# EAGLE board DA14580_QFN40_0v5_P (EAGLE 7.5.0)
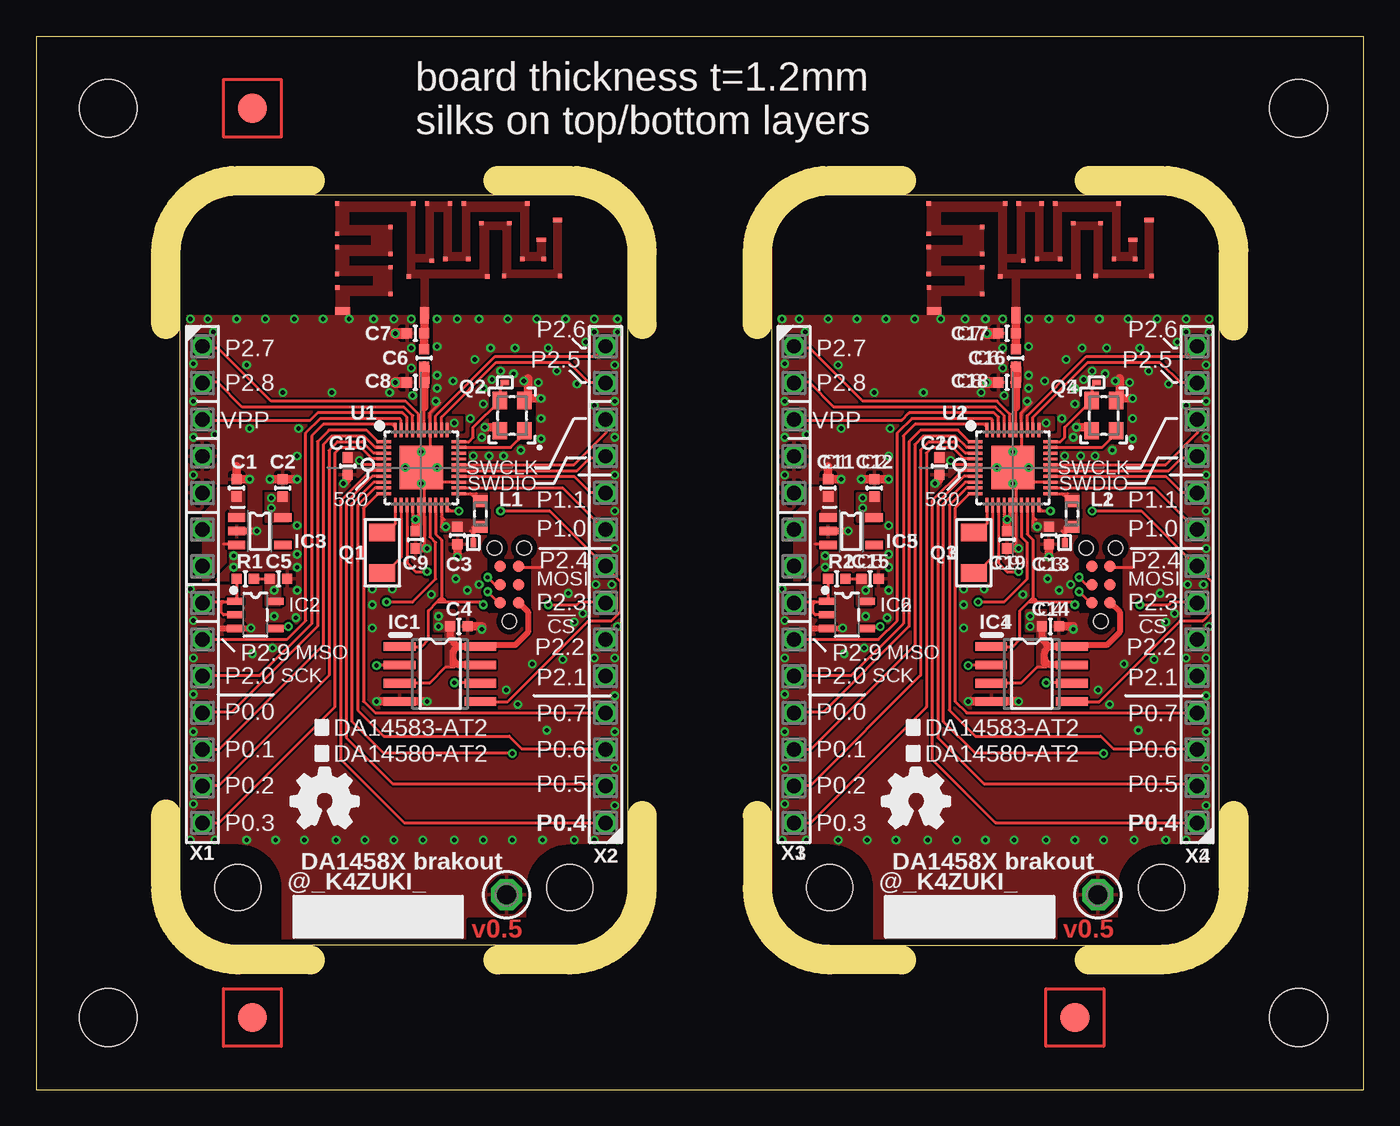
[diagram p0: board, top side]
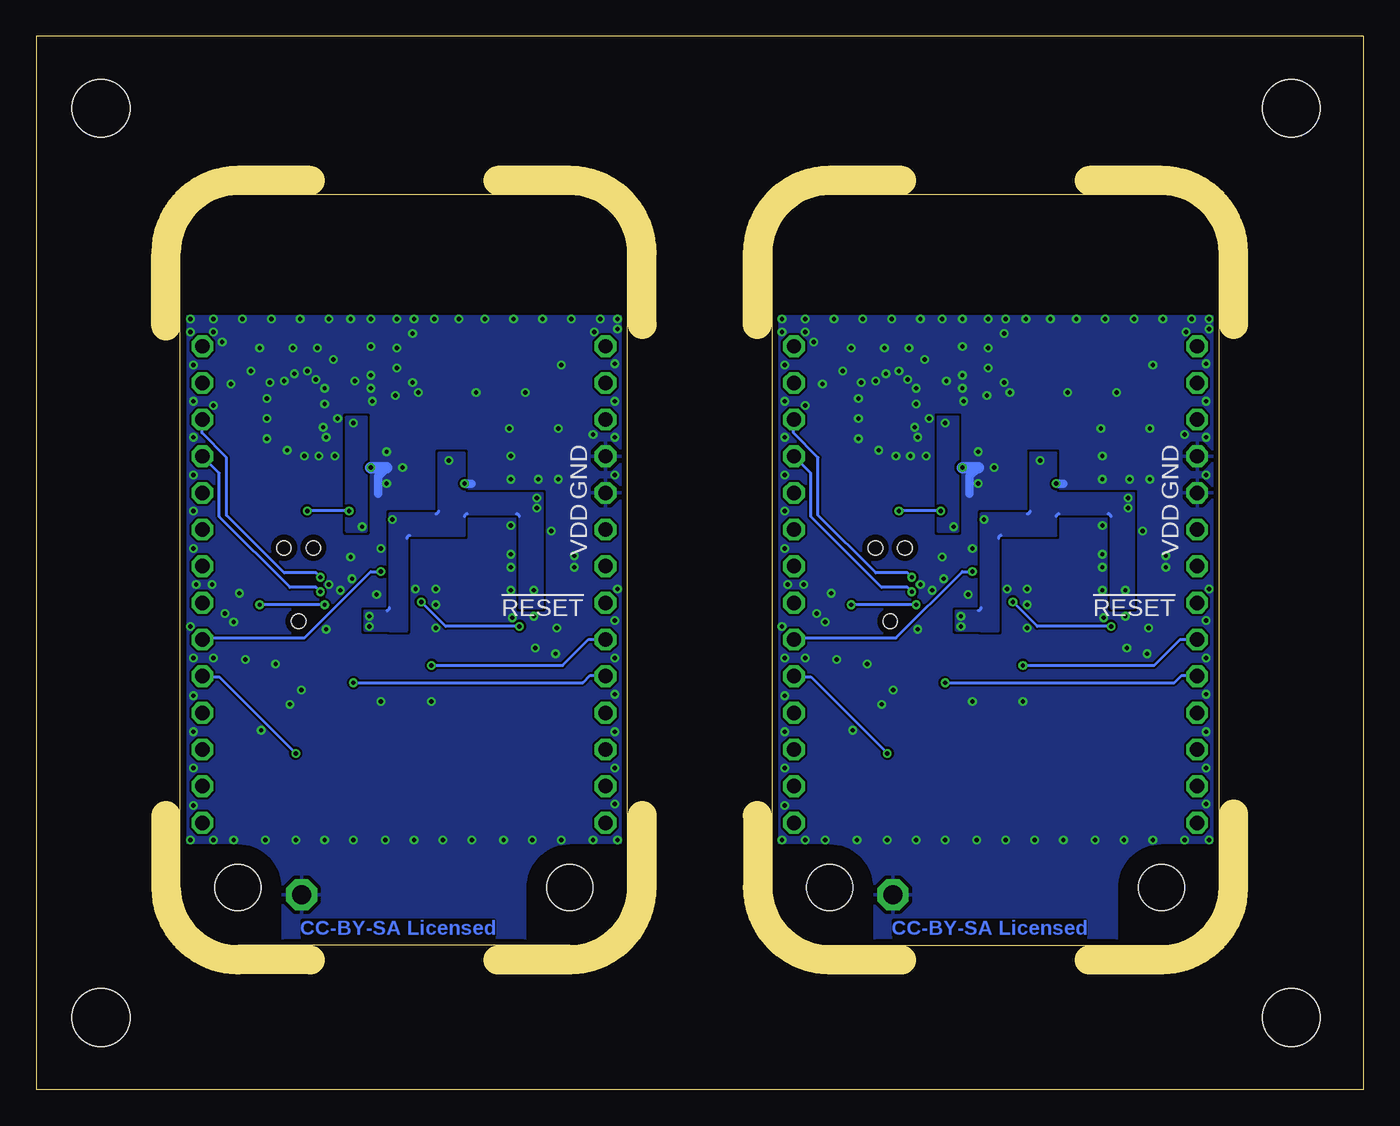
[diagram p1: board, bottom side, seen from below]

Size 92 x 73 mm. Coordinates in mm from the lower left corner, seen from the top.
Outline: 14,10 arc-90 10,14 10,58 arc-90 14,62 37,62 arc-90 41,58 41,14 arc-90 37,10 14,10
Outline: 0,73 92,73 92,0 0,0 0,73
Outline: 51,14 51,58 arc-90 55,62 78,62 arc-90 82,58 82,14 arc-90 78,10 55,10 arc-90 51,14
Copper layers (1*16): Top 0.0356mm / dielectric 1.5011mm / Bottom 0.0356mm
Design rules "SilverCircuits.2 *": minimum track width 0.15mm, minimum drill 0.3mm, track to track 0.15mm, track to pad 0.15mm, pad to pad 0.15mm, via to via 0.15mm, smd to smd 0mil, copper to edge 0.4mm, drill to drill 0.15mm, minimum pad ring 10mil, minimum via ring 0.15mm, stop-mask expansion 0.05mm, vias tented up to drill 100mil, thermal gap 10mil
Net classes: 0 signal: width 0.15 mm, drill 0.3 mm, clearance 0.15 mm; 1 power: width 0.15 mm, drill 0.3 mm, clearance 0.15 mm
Holes 3.2 mm at 14,14 37,14 55,14 78,14
Holes 4 mm at 5,5 5,68 87.5,68 87.5,5
tRestrict: area 23,36.8 to 24.8,37.6; area 30.2,39.6 to 31.4,40.2; area 31.5,44.8 to 34.5,48.6; area 10,10 to 17,17; area 34,10 to 41,17; area 10,53.7 to 20.2,62; area 37.2,53.7 to 41,62; area 26.3,50.5 to 27.5,53.8; area 31.4,33.1 to 34.2,36.7; area 64,36.8 to 65.8,37.6; area 71.2,39.6 to 72.4,40.2; area 72.5,44.8 to 75.5,48.6; 6 more areas; 34 lines
bRestrict: area 34,10 to 41,17; area 10,10 to 17,17; area 10,53.7 to 20.2,62; area 37.2,53.7 to 41,62; area 75,10 to 82,17; area 51,10 to 58,17; area 51,53.7 to 61.2,62; area 78.2,53.7 to 82,62; 12 lines
Milling: 24 lines

## Footprints (pad centres in the part's own frame; a part is rotated, then mirrored left to right if it is on the bottom)
C0402 = smd 0.7 x 0.7: 1 -0.6,0; 2 0.6,0
CON_TC2030-IDC-NL = smd 0.787 x 0.787: 1 -1.27,-0.635; 2 -1.27,0.635; 3 0,-0.635; 4 0,0.635; 5 1.27,-0.635; 6 1.27,0.635 | hole 0.991: -2.54,0; 2.54,1.016; 2.54,-1.016
IC_08_1.27_150MIL = smd 0.6 x 2.2: 1 -1.905,-2.8; 2 -0.635,-2.8; 3 0.635,-2.8; 4 1.905,-2.8; 5 1.905,2.8; 6 0.635,2.8; 7 -0.635,2.8 | smd 0.603 x 2.2: 8 -1.905,2.8
SOT23-5 = smd 0.5 x 1.1: 1 -0.95,-1.4; 2 0,-1.4; 3 0.95,-1.4; 4 0.95,1.4; 5 -0.95,1.4
IC_05_0.95_50MIL = smd 0.6 x 1.2: 1 -0.95,-1.6; 2 0,-1.6; 3 0.95,-1.6; 4 0.95,1.6; 5 -0.95,1.6
L_1608 = smd 0.8 x 1: 1 -0.9,0; 2 0.9,0
CRYSTAL_FC-135 = smd 1.2 x 1.8: 1 -1.4,0; 2 1.4,0
CLOCK_2520 = smd 1.2 x 1: 1 -1.05,-0.85; 2 1.05,-0.85; 3 1.05,0.85; 4 -1.05,0.85
TP06RECT = smd 0.4 x 0.6: TP 0,0
P1-13 = drill 1.321 pad 2.159 octagon: TP 0,0
FIDUCIAL = smd 2 x 2: TP 0,0
QFN40_0.4P5.0X5.0 = smd 1 x 0.2: 1 -2.6,1.8; 2 -2.6,1.4; 3 -2.6,1; 4 -2.6,0.6; 5 -2.6,0.2; 6 -2.6,-0.2; 7 -2.6,-0.6; 8 -2.6,-1; 9 -2.6,-1.4; 10 -2.6,-1.8; 21 2.6,-1.8; 22 2.6,-1.4; 23 2.6,-1; 24 2.6,-0.6; 25 2.6,-0.2; 26 2.6,0.2; 27 2.6,0.6; 28 2.6,1; 29 2.6,1.4; 30 2.6,1.8 | smd 0.2 x 1: 11 -1.8,-2.6; 12 -1.4,-2.6; 13 -1,-2.6; 14 -0.6,-2.6; 15 -0.2,-2.6; 16 0.2,-2.6; 17 0.6,-2.6; 18 1,-2.6; 19 1.4,-2.6; 20 1.8,-2.6; 31 1.8,2.6; 32 1.4,2.6; 33 1,2.6; 34 0.6,2.6; 35 0.2,2.6; 36 -0.2,2.6; 37 -0.6,2.6; 38 -1,2.6; 39 -1.4,2.6; 40 -1.8,2.6 | smd 3 x 3: BP 0,0
ANT_IFA_V2 = smd 0.6 x 0.6: ANT 0.015,-0.3 | smd 1.02 x 0.5: GND -5.66,0.25 | smd 0.3 x 0.3: GND@1 -2.33,1.42; GND@3 -6.02,1.88; GND@4 -2.33,3.28; GND@5 -6.03,2.81; GND@6 -6.03,4.68; GND@7 -2.33,4.21; GND@8 -2.33,6.07; GND@9 -6.03,5.61; GND@10 -6.03,7.69; GND@11 -0.74,7.69; GND@12 -1.07,2.65; GND@13 4.37,2.65; GND@14 0.53,3.73; GND@15 0.2,7.69; GND@16 1.8,7.69; GND@17 1.47,3.86; GND@18 3.07,3.86; GND@19 2.74,7.69; GND@20 7.14,7.69; GND@21 3.97,6.33; GND@22 5.89,6.33; GND@23 5.54,2.67; GND@24 6.8,3.86; GND@25 8.28,3.86; GND@26 7.94,5.19; GND@27 8.28,5.19; GND@28 9.42,2.67; GND@29 9.08,6.56; GND@30 9.42,6.56 | smd 0.63 x 0.5: GND@2 0.015,0.25
SSW-114-02-S-S = drill 1 pad 1.5 octagon: 1 -16.51,0; 2 -13.97,0; 3 -11.43,0; 4 -8.89,0; 5 -6.35,0; 6 -3.81,0; 7 -1.27,0; 8 1.27,0; 9 3.81,0; 10 6.35,0; 11 8.89,0; 12 11.43,0; 13 13.97,0; 14 16.51,0

## Placement (x,y rotation side)
C1  [C0402]  13.9,41.7 90 top
C2  [C0402]  17.1,41.7 90 top
C3  [C0402]  29.2,38.4 270 top
C4  [C0402]  29.3,32.1 0 top
C5  [C0402]  16.8,35.4 0 top
C6  NM  [C0402]  26.9,50.7 90 top
C7  NM  [C0402]  26.3,52.4 180 top
C8  NM  [C0402]  26.3,49 180 top
C9  [C0402]  26.3,38.1 270 top
C10  [C0402]  21.6,43.2 270 top
C11  [C0402]  54.9,41.7 90 top
C12  [C0402]  58.1,41.7 90 top
C13  [C0402]  70.2,38.4 270 top
C14  [C0402]  70.3,32.1 0 top
C15  [C0402]  57.8,35.4 0 top
C16  NM  [C0402]  67.9,50.7 90 top
C17  NM  [C0402]  67.3,52.4 180 top
C18  NM  [C0402]  67.3,49 180 top
C19  [C0402]  67.3,38.1 270 top
C20  [C0402]  62.6,43.2 270 top
CON1  CON_TC2030-CTL-NL  [CON_TC2030-IDC-NL]  32.8,35 90 top
CON2  CON_TC2030-CTL-NL  [CON_TC2030-IDC-NL]  73.8,35 90 top
IC1  IC_MEMORY_8P_AT25XE011_SOP  [IC_08_1.27_150MIL]  28,28.8 270 top
IC2  NC7SZ00M5XCT-ND  [SOT23-5]  15.2,32.9 270 top
IC3  LDO5_3.3_SOT23  [IC_05_0.95_50MIL]  15.5,38.7 270 top
IC4  IC_MEMORY_8P_AT25XE011_SOP  [IC_08_1.27_150MIL]  69,28.8 270 top
IC5  LDO5_3.3_SOT23  [IC_05_0.95_50MIL]  56.5,38.7 270 top
IC6  NC7SZ00M5XCT-ND  [SOT23-5]  56.2,32.9 270 top
L1  [L_1608]  30.8,39.9 90 top
L2  [L_1608]  71.8,39.9 90 top
Q1  32.768k  [CRYSTAL_FC-135]  24,37.2 90 top
Q2  16M/2520  [CLOCK_2520]  33,46.7 90 top
Q3  32.768k  [CRYSTAL_FC-135]  65,37.2 90 top
Q4  16M/2520  [CLOCK_2520]  74,46.7 90 top
R1  [C0402]  14.5,35.4 0 top
R2  [C0402]  55.5,35.4 0 top
TP1  TESTPAD  [TP06RECT]  30.3,37.9 0 top
TP2  TESTPAD  [TP06RECT]  32.5,49 90 top
TP3  TPPAD1-13  [P1-13]  32.6,13.5 0 top
TP4  TPPAD1-13  [P1-13]  73.6,13.5 0 top
TP5  TESTPAD  [TP06RECT]  71.3,37.9 0 top
TP6  TESTPAD  [TP06RECT]  73.5,49 90 top
TP91  TESTPAD_F  [FIDUCIAL]  15,68 0 top
TP92  TESTPAD_F  [FIDUCIAL]  15,5 0 top
TP93  TESTPAD_F  [FIDUCIAL]  72,5 0 top
U1  DA14583AT2  [QFN40_0.4P5.0X5.0]  26.7,43.1 0 top
U2  DA14583AT2  [QFN40_0.4P5.0X5.0]  67.7,43.1 0 top
U$1  ANT_IFA  [ANT_IFA_V2]  26.9,53.7 0 top
U$2  ICON_OSHW  [ICON_OSHW]  20,20 0 top
U$3  ANT_IFA  [ANT_IFA_V2]  67.9,53.7 0 top
U$4  ICON_OSHW  [ICON_OSHW]  61,20 0 top
X1  SSW-114-02-S-S  [SSW-114-02-S-S]  11.53,35 270 top
X2  SSW-114-02-S-S  [SSW-114-02-S-S]  39.47,35 90 top
X3  SSW-114-02-S-S  [SSW-114-02-S-S]  52.53,35 270 top
X4  SSW-114-02-S-S  [SSW-114-02-S-S]  80.47,35 90 top

## Library data of the parts
C1-C3 C9 C11-C13 C19 = mylib; DIGIKEY: 490-3890-1-ND
C4 C5 C10 C14 C15 C20 = mylib; DIGIKEY: 490-3261-1-ND
C6 C16 = mylib; DIGIKEY: 490-5921-1-ND
C7 C8 C17 C18 CON1 CON2 TP1 TP2 TP5 TP6 TP91-TP93 U$1-U$4 = mylib
IC1 IC4 = mylib; DIGIKEY: 1265-1137-1-ND
IC2 IC6 = 74xx-little-us_local
IC3 IC5 = mylib; AKIZUKI: I-05448
L1 L2 = mylib; DIGIKEY: 445-6385-1-ND
Q1 Q3 = mylib; DIGIKEY: 728-1076-1-ND
Q2 Q4 = mylib; DIGIKEY: 887-1833-1-ND
R1 R2 = mylib; DIGIKEY: P10.0KLCT-ND
TP3 TP4 = testpad_local
U1 U2 = mylib; MOUSER: 724-DA14583-01AT2
X1-X4 = con-samtec.local

## Nets
!RESET!: IC2.1 IC2.2 R1.1 X1.8
!RESET!1: IC6.1 IC6.2 R2.1 X3.8
GND: C1.2 C2.2 C3.2 C4.2 C5.2 C6.2 C7.1 C7.2 C8.2 C9.2 C10.2 CON1.5 IC1.4 IC2.3 IC3.2 Q2.2 Q2.4 TP3.TP U1.16 U1.23 U1.34 U1.BP U$1.ANT U$1.GND U$1.GND@1 U$1.GND@2 U$1.GND@3 U$1.GND@4 U$1.GND@5 U$1.GND@6 U$1.GND@7 U$1.GND@8 U$1.GND@9 U$1.GND@10 U$1.GND@11 U$1.GND@12 U$1.GND@13 U$1.GND@14 U$1.GND@15 U$1.GND@16 U$1.GND@17 U$1.GND@18 U$1.GND@19 U$1.GND@20 U$1.GND@21 U$1.GND@22 U$1.GND@23 U$1.GND@24 U$1.GND@25 U$1.GND@26 U$1.GND@27 U$1.GND@28 U$1.GND@29 U$1.GND@30 X1.4 X1.5
GND1: C11.2 C12.2 C13.2 C14.2 C15.2 C16.2 C17.1 C17.2 C18.2 C19.2 C20.2 CON2.5 IC4.4 IC5.2 IC6.3 Q4.2 Q4.4 TP4.TP U2.16 U2.23 U2.34 U2.BP U$3.ANT U$3.GND U$3.GND@1 U$3.GND@2 U$3.GND@3 U$3.GND@4 U$3.GND@5 U$3.GND@6 U$3.GND@7 U$3.GND@8 U$3.GND@9 U$3.GND@10 U$3.GND@11 U$3.GND@12 U$3.GND@13 U$3.GND@14 U$3.GND@15 U$3.GND@16 U$3.GND@17 U$3.GND@18 U$3.GND@19 U$3.GND@20 U$3.GND@21 U$3.GND@22 U$3.GND@23 U$3.GND@24 U$3.GND@25 U$3.GND@26 U$3.GND@27 U$3.GND@28 U$3.GND@29 U$3.GND@30 X3.4 X3.5
N$1: C6.1 C8.1 U1.35
N$2: Q3.1 U2.12
N$3: Q3.2 U2.11
N$4: Q4.1 U2.29
N$5: Q4.3 TP6.TP U2.30
N$6: L1.2 U1.21
N$7: L2.2 U2.21
N$8: C13.1 L2.1 TP5.TP U2.19 U2.31
N$9: C3.1 L1.1 TP1.TP U1.19 U1.31
N$10: C16.1 C18.1 U2.35
N$18: Q1.1 U1.12
N$19: Q1.2 U1.11
N$20: Q2.1 U1.29
N$21: Q2.3 TP2.TP U1.30
P0_0: U1.1 X1.11
P0_1: U1.2 X1.12
P0_2: U1.3 X1.13
P0_3: U1.4 X1.14
P0_4: U1.6 X2.1
P0_5: U1.7 X2.2
P0_6: U1.9 X2.3
P0_7: U1.10 X2.4
P0_8: U2.1 X3.11
P0_9: U2.2 X3.12
P0_10: U2.3 X3.13
P0_11: U2.4 X3.14
P0_12: U2.7 X4.2
P0_13: U2.6 X4.1
P0_14: U2.10 X4.4
P0_15: U2.9 X4.3
P1_0: U1.22 X2.9
P1_1: U1.24 X2.10
P1_2: U1.27
P1_3: U1.28
P1_4: U2.22 X4.9
P1_5: U2.24 X4.10
P1_6: U2.27
P1_7: U2.28
P2_0: IC1.6 U1.40 X1.10
P2_1: U1.8 X2.5
P2_2: U1.13 X2.6
P2_3: IC1.1 U1.18 X2.7
P2_4: IC1.5 U1.20 X2.8
P2_5: U1.32 X2.13
P2_6: U1.33 X2.14
P2_7: U1.36 X1.1
P2_8: U1.37 X1.2
P2_9: IC1.2 U1.39 X1.9
P2_10: IC4.1 U2.18 X4.7
P2_11: U2.13 X4.6
P2_12: IC4.6 U2.40 X3.10
P2_13: U2.8 X4.5
P2_14: U2.32 X4.13
P2_15: U2.33 X4.14
P2_16: IC4.2 U2.39 X3.9
P2_17: IC4.5 U2.20 X4.8
P2_18: U2.36 X3.1
P2_19: U2.37 X3.2
RESET: IC2.4 U1.17
RESET1: IC6.4 U2.17
SWCLK: CON1.4 U1.26 X2.12
SWCLK1: CON2.4 U2.26 X4.12
SWDIO: CON1.2 U1.25 X2.11
SWDIO1: CON2.2 U2.25 X4.11
VCC: C2.1 C4.1 C5.1 C9.1 C10.1 CON1.1 IC1.3 IC1.7 IC1.8 IC2.5 IC3.5 R1.2 U1.5 U1.14 U1.15
VCC1: C12.1 C14.1 C15.1 C19.1 C20.1 CON2.1 IC4.3 IC4.7 IC4.8 IC5.5 IC6.5 R2.2 U2.5 U2.14 U2.15
VDD: C1.1 IC3.1 IC3.3 X1.6 X1.7
VDD1: C11.1 IC5.1 IC5.3 X3.6 X3.7
VPP [power]: U1.38 X1.3
VPP1 [power]: U2.38 X3.3

## Tracks (layer width: path | path; a pad name or v marks a point on that pad's centre or on a via)
!RESET!
  Top 0.2: 12.8,33.8 12.8,33.6 | 12.8,33.6 12.8,33.1 13,32.9 IC2.2 | X1.8 11.6,33.8 12.6,33.8 | 12.6,33.8 12.8,33.8 | 12.6,33.8 12.8,33.6 | 12.8,33.6 13,33.8 | 13,33.8 12.8,33.8 | 13,33.8 13.75,33.8 IC2.1 13.9,33.95 R1.1
!RESET!1
  Top 0.2: 53.8,33.8 53.8,33.6 | 53.8,33.6 53.8,33.1 54,32.9 IC6.2 | X3.8 52.6,33.8 53.6,33.8 | 53.6,33.8 53.8,33.8 | 53.6,33.8 53.8,33.6 | 53.8,33.6 54,33.8 | 54,33.8 53.8,33.8 | 54,33.8 54.75,33.8 IC6.1 54.9,33.95 R2.1
GND  (via drill 0.3)
  Top 0.2: U1.23 27.7,42.1 | 26.9,37.5 U1.16 26.9,41.8 v26.7,42 U1.BP 27.3,43.7 U1.34 27.3,46.9 28,47.6 | CON1.5 33.5,36.2 35,36.2
  Top 0.3: v14.9,32 12.8,32 12.8,31.9 14.9,31.9
  Top 0.5: v15.3,38.7 IC3.2
  Top 0.6: v35,47.9 34,47.9 Q2.2 | 34.1,49.3 34.1,48.3 | v31.1,45.9 31.9,45.9 Q2.4 | v21.3,42 21.6,42.3 C10.2 | U$1.ANT 26.91,52.41 C7.1 C6.2 | v27.1,37.5 C9.2 | v29.2,36.9 C3.2 | C4.2 30.9,32.1 v30.9,31.9 | v23.6,26.9 v27.1,26.9 | v14.8,42.3 C1.2 13.9,43.2 | v16.2,42.3 C2.2 v18.1,42.3
  Top 0.63: U$1.GND@2 U$1.ANT
  Top 0.75: v24.9,49 C8.2 | v24.9,52.4 C7.2
  Bottom 0.6: 27.3,41.3 27.3,42.5 U1.BP | v21.3,42 20.8,42
  Bottom 0.8: v27.8,43.1 U1.BP
  other vias: 33.8,49.1 30.3,43.9 31.4,43.9 32.4,43.9 33.6,44.3 30.9,45.2 30.1,46.5 31,47.5 31,48.6 33.1,49.6 34.8,49 35,46.5 35,45.1 18.1,34.6 31.6,49.2 19.9,53.4 21.7,53.4 17.9,53.4 13.9,53.4 15.9,53.4 23.4,53.4 10.7,53.4 11.9,53.4 26,53.4 29.2,53.4 30.7,53.4 10.9,50.3 10.9,47.7 10.9,45.2 10.9,42.6 10.9,32.5 10.9,29.9 10.9,27.4 40.1,50.2 40.1,47.7 40.1,45.2 40.1,42.6 40.1,40.1 40.1,37.5 39.9,35 40.3,32.1 40.1,29.9 10.7,52.7 40.3,52.5 27.8,53.4 27.8,49.5 27.8,51.5 32.7,53.4 34.7,53.4 36.7,53.4 38.7,53.4 40.3,53.4 26,51.4 26,50 27.7,47.7 10.9,24.8 10.9,22.3 10.9,19.8 10.7,17.3 12.4,17.3 26.1,48.1 18.6,17.3 14.6,17.3 16.6,17.3 26.8,17.3 24.8,17.3 20.8,17.3 22.8,17.3 33,17.3 29,17.3 31,17.3 38.7,17.3 40.3,17.3 35.1,17.3 37.3,17.3 40.1,27.3 40.1,24.8 40.1,22.3 40.1,19.7 24.8,53.4 27.8,48.6 12.3,52.5 14.6,50.2 17.1,48.3 20.5,48.3 24.5,48.3 28.9,49.1 30.4,50.6 31.5,51.4 33.2,51.4 35.5,51.4 38.1,51.8 38.7,52.5 38.7,47.4 37.5,48.9 36.1,49.8 12.4,45.4 18.2,45.8 14.8,45.8 18.1,43.9 18.1,39.1 18.1,37.1 18.1,36.2 18,32.7 16.5,32.8 16.4,30.6 15,30.2 29.1,35.4 29.9,34.6 30.7,35 36.9,34.4 38.8,35 23.3,32 23.3,34.7 23.3,33.6 24.7,34.7 27.4,34.3 37.9,33 37.3,32.4 10.7,34.7 32.6,27.7 34.4,29.5 33.4,26.7 36.5,29.8 38.7,29.9 35.4,24.9 13.7,37 13.7,36.2 26.7,44.2 25.6,43.1 32.2,49.8
  pour Top (rank 2): 10,62 41,62 41,10 10,10
  pour Bottom (rank 2): 10,62 41,62 41,10 10,10
  pour Top (no thermals): 30.1,44.8 35.2,44.8 35.2,49.2 30.1,49.2
  pour Bottom (no thermals): 24.7,42.7 26.7,42.7 26.7,43.5 24.7,43.5
  pour Bottom (no thermals): 27.1,43.1 27.1,45.1 26.3,45.1 26.3,43.1
  pour Bottom (no thermals): 27.1,41.1 27.1,43.1 26.3,43.1 26.3,41.1
GND1  (via drill 0.3)
  Top 0.2: U2.23 68.7,42.1 | 67.9,37.5 U2.16 67.9,41.8 v67.7,42 U2.BP 68.3,43.7 U2.34 68.3,46.9 69,47.6 | CON2.5 74.5,36.2 76,36.2
  Top 0.3: v55.9,32 53.8,32 53.8,31.9 55.9,31.9
  Top 0.5: v56.3,38.7 IC5.2
  Top 0.6: v76,47.9 75,47.9 Q4.2 | 75.1,49.3 75.1,48.3 | v72.1,45.9 72.9,45.9 Q4.4 | v62.3,42 62.6,42.3 C20.2 | U$3.ANT 67.92,52.41 C17.1 C16.2 | v68.1,37.5 C19.2 | v70.2,36.9 C13.2 | C14.2 71.9,32.1 v71.9,31.9 | v64.6,26.9 v68.1,26.9 | v55.8,42.3 C11.2 54.9,43.2 | v57.2,42.3 C12.2 v59.1,42.3
  Top 0.63: U$3.GND@2 U$3.ANT
  Top 0.75: v65.9,49 C18.2 | v65.9,52.4 C17.2
  Bottom 0.6: 68.3,41.3 68.3,42.5 U2.BP | v62.3,42 61.8,42
  Bottom 0.8: v68.8,43.1 U2.BP
  other vias: 74.8,49.1 71.3,43.9 72.4,43.9 73.4,43.9 74.6,44.3 71.9,45.2 71.1,46.5 72,47.5 72,48.6 74.1,49.6 75.8,49 76,46.5 76,45.1 59.1,34.6 72.6,49.2 60.9,53.4 62.7,53.4 58.9,53.4 54.9,53.4 56.9,53.4 64.4,53.4 51.7,53.4 52.9,53.4 67,53.4 70.2,53.4 71.7,53.4 51.9,50.3 51.9,47.7 51.9,45.2 51.9,42.6 51.9,32.5 51.9,29.9 51.9,27.4 81.1,50.2 81.1,47.7 81.1,45.2 81.1,42.6 81.1,40.1 81.1,37.5 80.9,35 81.3,32.1 81.1,29.9 51.7,52.7 81.3,52.5 68.8,53.4 68.8,49.5 68.8,51.5 73.7,53.4 75.7,53.4 77.7,53.4 79.7,53.4 81.3,53.4 67,51.4 67,50 68.7,47.7 51.9,24.8 51.9,22.3 51.9,19.8 51.7,17.3 53.4,17.3 67.1,48.1 59.6,17.3 55.6,17.3 57.6,17.3 67.8,17.3 65.8,17.3 61.8,17.3 63.8,17.3 74,17.3 70,17.3 72,17.3 79.7,17.3 81.3,17.3 76.1,17.3 78.3,17.3 81.1,27.3 81.1,24.8 81.1,22.3 81.1,19.7 65.8,53.4 68.8,48.6 53.3,52.5 55.6,50.2 58.1,48.3 61.5,48.3 65.5,48.3 69.9,49.1 71.4,50.6 72.5,51.4 74.2,51.4 76.5,51.4 79.1,51.8 79.7,52.5 79.7,47.4 78.5,48.9 77.1,49.8 53.4,45.4 59.2,45.8 55.8,45.8 59.1,43.9 59.1,39.1 59.1,37.1 59.1,36.2 59,32.7 57.5,32.8 57.4,30.6 56,30.2 70.1,35.4 70.9,34.6 71.7,35 77.9,34.4 79.8,35 64.3,32 64.3,34.7 64.3,33.6 65.7,34.7 68.4,34.3 78.9,33 78.3,32.4 51.7,34.7 73.6,27.7 75.4,29.5 74.4,26.7 77.5,29.8 79.7,29.9 76.4,24.9 54.7,37 54.7,36.2 67.7,44.2 66.6,43.1 73.2,49.8
  pour Top (rank 2): 51,62 82,62 82,10 51,10
  pour Bottom (rank 2): 51,62 82,62 82,10 51,10
  pour Top (no thermals): 71.1,44.8 76.2,44.8 76.2,49.2 71.1,49.2
  pour Bottom (no thermals): 65.7,42.7 67.7,42.7 67.7,43.5 65.7,43.5
  pour Bottom (no thermals): 68.1,43.1 68.1,45.1 67.3,45.1 67.3,43.1
  pour Bottom (no thermals): 68.1,41.1 68.1,43.1 67.3,43.1 67.3,41.1
N$1
  Top 0.2: U1.35 26.9,47.3
  Top 0.6: 26.9,47.3 C8.1
  Top 0.75: C6.1 C8.1
N$2
  Top 0.2: U2.12 66.3,36.9 65.3,35.9 Q3.1
N$3
  Top 0.2: U2.11 65.9,39.2 65.2,38.5 Q3.2
N$4
  Top 0.2: U2.29 73.9,44.5 74.85,45.45 Q4.1
N$5
  Top 0.2: U2.30 71,44.9 71.3,45.2 71.3,45.9 Q4.3 73.2,47.8 73.2,48.7 TP6.TP
N$6
  Top 0.2: U1.21 30.1,41.3 | 30.1,41.3 30.5,41.3 | 30.1,41.3 30.4,41
  pour Top (no thermals): 30.4,41.3 31.2,41.3 31.2,40.4 30.4,40.4
N$7
  Top 0.2: U2.21 71.1,41.3 | 71.1,41.3 71.5,41.3 | 71.1,41.3 71.4,41
  pour Top (no thermals): 71.4,41.3 72.2,41.3 72.2,40.4 71.4,40.4
N$8  (via drill 0.3)
  Top 0.2: U2.19 69.1,39.7 | 69.1,39.7 69.1,39 | 71.3,38.5 71.3,39 L2.1 | 69.1,39.7 69.3,39.5 | 71.3,38.5 71.1,38.7 | 71.3,38.5 71.5,38.7 | 71.3,38.5 TP5.TP
  other vias: 69.4,39 70,46.2
  pour Top (no thermals): 69.1,39.5 72.2,39.5 72.2,38.7 69.1,38.7
  pour Top (no thermals): 69.5,46.6 70.5,46.6 70.5,45.7 69.5,45.7
  pour Bottom (no thermals): 69.1,46.6 70.5,46.6 70.5,38.7 69.1,38.7
N$9  (via drill 0.3)
  Top 0.2: U1.19 28.1,39.7 | 28.1,39.7 28.1,39 | 30.3,38.5 30.3,39 L1.1 | 28.1,39.7 28.3,39.5 | 30.3,38.5 30.1,38.7 | 30.3,38.5 30.5,38.7 | 30.3,38.5 TP1.TP
  other vias: 28.4,39 29,46.2
  pour Top (no thermals): 28.1,39.5 31.2,39.5 31.2,38.7 28.1,38.7
  pour Top (no thermals): 28.5,46.6 29.5,46.6 29.5,45.7 28.5,45.7
  pour Bottom (no thermals): 28.1,46.6 29.5,46.6 29.5,38.7 28.1,38.7
N$10
  Top 0.2: U2.35 67.9,47.3
  Top 0.6: 67.9,47.3 C18.1
  Top 0.75: C16.1 C18.1
N$18
  Top 0.2: U1.12 25.3,36.9 24.3,35.9 Q1.1
N$19
  Top 0.2: U1.11 24.9,39.2 24.2,38.5 Q1.2
N$20
  Top 0.2: U1.29 32.9,44.5 33.85,45.45 Q2.1
N$21
  Top 0.2: U1.30 30,44.9 30.3,45.2 30.3,45.9 Q2.3 32.2,47.8 32.2,48.7 TP2.TP
P0_0
  Top 0.2: X1.11 11.53,26.13 11.6,26.2 13.6,26.2 19.5,32.1 19.5,44.9 20.3,45.7 22.9,45.7 23.7,44.9 U1.1
P0_1
  Top 0.2: U1.2 23.5,44.5 22.7,45.3 20.5,45.3 19.9,44.7 19.9,30.8 12.7,23.6 11.6,23.6 11.57,23.57 X1.12
P0_2
  Top 0.2: U1.3 23.4,44.1 22.6,44.9 20.9,44.9 20.3,44.3 20.3,28.7 12.7,21.1 11.7,21.1 11.63,21.03 X1.13
P0_3
  Top 0.2: U1.4 23.3,43.7 22.5,44.5 21.1,44.5 20.7,44.1 20.7,26.5 12.7,18.5 11.6,18.5 11.59,18.49 X1.14
P0_4
  Top 0.2: U1.6 23.2,42.9 21.1,40.8 21.1,22.9 25.5,18.5 X2.1
P0_5
  Top 0.2: U1.7 23.3,42.5 21.5,40.7 21.5,24.4 24.7,21.2 39.3,21.2 X2.2
P0_6
  Top 0.2: U1.9 23.5,41.7 22.3,40.5 22.3,26.3 24.1,24.5 32.8,24.5 33.7,23.6 39.4,23.6 39.43,23.57 X2.3
P0_7
  Top 0.2: X2.4 23.5,26.1 22.7,26.9 22.7,40.3 23.7,41.3 U1.10
P0_8
  Top 0.2: X3.11 52.53,26.13 52.6,26.2 54.6,26.2 60.5,32.1 60.5,44.9 61.3,45.7 63.9,45.7 64.7,44.9 U2.1
P0_9
  Top 0.2: U2.2 64.5,44.5 63.7,45.3 61.5,45.3 60.9,44.7 60.9,30.8 53.7,23.6 52.6,23.6 52.57,23.57 X3.12
P0_10
  Top 0.2: U2.3 64.4,44.1 63.6,44.9 61.9,44.9 61.3,44.3 61.3,28.7 53.7,21.1 52.7,21.1 52.63,21.03 X3.13
P0_11
  Top 0.2: U2.4 64.3,43.7 63.5,44.5 62.1,44.5 61.7,44.1 61.7,26.5 53.7,18.5 52.6,18.5 52.59,18.49 X3.14
P0_12
  Top 0.2: U2.7 64.3,42.5 62.5,40.7 62.5,24.4 65.7,21.2 80.3,21.2 X4.2
P0_13
  Top 0.2: U2.6 64.2,42.9 62.1,40.8 62.1,22.9 66.5,18.5 X4.1
P0_14
  Top 0.2: X4.4 64.5,26.1 63.7,26.9 63.7,40.3 64.7,41.3 U2.10
P0_15
  Top 0.2: U2.9 64.5,41.7 63.3,40.5 63.3,26.3 65.1,24.5 73.8,24.5 74.7,23.6 80.4,23.6 80.43,23.57 X4.3
P1_0
  Top 0.2: X2.9 39.38,38.9 39.3,38.9 36.5,41.7 U1.22
P1_1
  Top 0.2: U1.24 37.3,42.5 38.4,41.4 39.42,41.4 X2.10
P1_4
  Top 0.2: X4.9 80.38,38.9 80.3,38.9 77.5,41.7 U2.22
P1_5
  Top 0.2: U2.24 78.3,42.5 79.4,41.4 80.42,41.4 X4.10
P2_0  (via drill 0.3)
  Top 0.2: IC1.6 30.73,28.16 30.7,28.2 v29,28.2 | X1.10 11.55,28.65 11.6,28.7 15.5,28.7 19.1,32.3 19.1,45.3 19.9,46.1 24.7,46.1 | 24.7,46.1 24.9,46.1 24.9,45.9 | 24.9,45.9 U1.40 | 24.7,46.1 24.9,45.9
  Bottom 0.2: v29,28.2 13.1,28.2 12.6,28.7 11.58,28.7 X1.10
P2_1  (via drill 0.3)
  Top 0.2: v33,23.3 24.1,23.3 21.9,25.5 21.9,40.6 23.4,42.1 U1.8
  Bottom 0.2: X2.5 39.45,28.65 39.4,28.6 38.3,28.6 v33,23.3
P2_2  (via drill 0.3)
  Top 0.2: U1.13 25.7,36.5 26.3,35.9 v27.1,35.9
  Bottom 0.2: X2.6 39.41,31.19 39.3,31.3 32.4,31.3 27.8,35.9 v27.1,35.9
P2_3  (via drill 0.3)
  Top 0.2: IC1.1 26.7,30.7 27.2,31.2 27.2,33.2 27.8,33.8 | 27.8,33.8 27.9,33.9 | 27.9,33.9 28.1,34.1 | U1.18 27.7,38.5 28.1,38.1 28.1,34.1 | 27.8,33.8 28.4,33.8 | 28.4,33.8 30.8,33.8 v31,33.6 | v35.5,33.6 37.5,33.6 37.7,33.8 39.4,33.8 X2.7 | 28.1,34.1 28.3,33.9 | 28.3,33.9 28.4,33.8 | 27.9,33.9 28.3,33.9
  Bottom 0.2: v31,33.6 v35.5,33.6
P2_4  (via drill 0.3, 0.3 pad 0.6)
  Top 0.2: IC1.5 32.7,26.89 38.3,32.5 39.9,32.5 40.5,33.1 40.5,35.2 39.5,36.2 39.5,36.3 X2.8 39.44,36.3 39.4,36.3 35.6,40.1 v32.2,40.1 | U1.20 28.5,40.3 | 28.5,40.3 28.5,40.1 28.7,40.1 | 28.7,40.1 v29.3,40.1 | 28.5,40.3 28.7,40.1
  Bottom 0.2: v29.3,40.1 v32.2,40.1
P2_5
  Top 0.2: U1.32 28.1,46.6 31.9,50.4 36.9,50.4 38.3,49 39.44,49 X2.13
P2_6
  Top 0.2: U1.33 27.7,46.7 31.8,50.8 38.76,50.8 X2.14 39.4,51.51 | 39.4,51.51 39.4,51.6 | 39.4,51.51 39.4,51.4
P2_7
  Top 0.2: U1.36 26.5,46.8 25.6,47.7 16.3,47.7 12.6,51.4 11.7,51.4 11.59,51.51 X1.1
P2_8
  Top 0.2: U1.37 26.1,46.7 25.5,47.3 14.3,47.3 12.6,49 11.56,49 X1.2 11.57,48.97 11.6,49
P2_9  (via drill 0.3)
  Top 0.2: IC1.2 25.2,29.4 v23.6,29.4 | U1.39 25.3,46.4 25.2,46.5 19.7,46.5 18.7,45.5 18.7,32.5 17.4,31.2 11.6,31.2 11.59,31.19 X1.9
  Bottom 0.2: v23.6,29.4 14.5,29.4 12.7,31.2 X1.9
P2_10  (via drill 0.3)
  Top 0.2: IC4.1 67.7,30.7 68.2,31.2 68.2,33.2 68.8,33.8 | 68.8,33.8 68.9,33.9 | 68.9,33.9 69.1,34.1 | U2.18 68.7,38.5 69.1,38.1 69.1,34.1 | 68.8,33.8 69.4,33.8 | 69.4,33.8 71.8,33.8 v72,33.6 | v76.5,33.6 78.5,33.6 78.7,33.8 80.4,33.8 X4.7 | 69.1,34.1 69.3,33.9 | 69.3,33.9 69.4,33.8 | 68.9,33.9 69.3,33.9
  Bottom 0.2: v72,33.6 v76.5,33.6
P2_11  (via drill 0.3)
  Top 0.2: U2.13 66.7,36.5 67.3,35.9 v68.1,35.9
  Bottom 0.2: X4.6 80.41,31.19 80.3,31.3 73.4,31.3 68.8,35.9 v68.1,35.9
P2_12  (via drill 0.3)
  Top 0.2: IC4.6 71.73,28.16 71.7,28.2 v70,28.2 | X3.10 52.55,28.65 52.6,28.7 56.5,28.7 60.1,32.3 60.1,45.3 60.9,46.1 65.7,46.1 | 65.7,46.1 65.9,46.1 65.9,45.9 | 65.9,45.9 U2.40 | 65.7,46.1 65.9,45.9
  Bottom 0.2: v70,28.2 54.1,28.2 53.6,28.7 52.58,28.7 X3.10
P2_13  (via drill 0.3)
  Top 0.2: v74,23.3 65.1,23.3 62.9,25.5 62.9,40.6 64.4,42.1 U2.8
  Bottom 0.2: X4.5 80.45,28.65 80.4,28.6 79.3,28.6 v74,23.3
P2_14
  Top 0.2: U2.32 69.1,46.6 72.9,50.4 77.9,50.4 79.3,49 80.44,49 X4.13
P2_15
  Top 0.2: U2.33 68.7,46.7 72.8,50.8 79.76,50.8 X4.14 80.4,51.51 | 80.4,51.51 80.4,51.6 | 80.4,51.51 80.4,51.4
P2_16  (via drill 0.3)
  Top 0.2: IC4.2 66.2,29.4 v64.6,29.4 | U2.39 66.3,46.4 66.2,46.5 60.7,46.5 59.7,45.5 59.7,32.5 58.4,31.2 52.6,31.2 52.59,31.19 X3.9
  Bottom 0.2: v64.6,29.4 55.5,29.4 53.7,31.2 X3.9
P2_17  (via drill 0.3, 0.3 pad 0.6)
  Top 0.2: IC4.5 73.69,26.89 79.3,32.5 80.9,32.5 81.5,33.1 81.5,35.2 80.5,36.2 80.5,36.3 X4.8 80.44,36.3 80.4,36.3 76.6,40.1 v73.2,40.1 | U2.20 69.5,40.3 | 69.5,40.3 69.5,40.1 69.7,40.1 | 69.7,40.1 v70.3,40.1 | 69.5,40.3 69.7,40.1
  Bottom 0.2: v70.3,40.1 v73.2,40.1
P2_18
  Top 0.2: U2.36 67.5,46.8 66.6,47.7 57.3,47.7 53.6,51.4 52.7,51.4 52.59,51.51 X3.1
P2_19
  Top 0.2: U2.37 67.1,46.7 66.5,47.3 55.3,47.3 53.6,49 52.56,49 X3.2 52.57,48.97 52.6,49
RESET  (via drill 0.3)
  Top 0.2: U1.17 27.3,38.3 27.7,37.9 27.7,35.4 26.1,33.8 v24.3,33.8 | v17.5,32.1 17.4,32 16.65,32 IC2.4
  Bottom 0.2: v17.5,32.1 22.6,32.1 v24.3,33.8
RESET1  (via drill 0.3)
  Top 0.2: U2.17 68.3,38.3 68.7,37.9 68.7,35.4 67.1,33.8 v65.3,33.8 | v58.5,32.1 58.4,32 57.65,32 IC6.4
  Bottom 0.2: v58.5,32.1 63.6,32.1 v65.3,33.8
SWCLK  (via drill 0.3 pad 0.6)
  Top 0.2: U1.26 37.3,43.3 39.5,45.5 39.5,46.3 39.4,46.4 39.4,46.43 X2.12 | CON1.4 31.8,35 v31.3,35.5
  Bottom 0.2: v31.3,35.5 31.6,35.8 33.8,35.8 37.8,39.8 37.8,43.8 39.5,45.5 39.5,46.4 X2.12
SWCLK1  (via drill 0.3 pad 0.6)
  Top 0.2: U2.26 78.3,43.3 80.5,45.5 80.5,46.3 80.4,46.4 80.4,46.43 X4.12 | CON2.4 72.8,35 v72.3,35.5
  Bottom 0.2: v72.3,35.5 72.6,35.8 74.8,35.8 78.8,39.8 78.8,43.8 80.5,45.5 80.5,46.4 X4.12
SWDIO  (via drill 0.3 pad 0.6)
  Top 0.2: X2.11 39.38,43.8 38.4,43.8 37.5,42.9 U1.25 | CON1.2 32.07,33.73 v31.3,34.5
  Bottom 0.2: v31.3,34.5 31.6,34.8 33.4,34.8 38.3,39.7 38.3,42.72 X2.11
SWDIO1  (via drill 0.3 pad 0.6)
  Top 0.2: X4.11 80.38,43.8 79.4,43.8 78.5,42.9 U2.25 | CON2.2 73.07,33.73 v72.3,34.5
  Bottom 0.2: v72.3,34.5 72.6,34.8 74.4,34.8 79.3,39.7 79.3,42.72 X4.11
VCC  (via drill 0.3)
  Top 0.2: R1.2 C5.1 | IC1.3 25.27,28.16 25.3,28.2 27.3,28.2 28.4,29.3 29,29.3 | U1.14 26.1,39.9 | 26.1,39.9 26.1,39.7 v26.3,39.5 26.5,39.7 26.5,39.9 | U1.15 26.5,39.9 | U1.5 22.7,43.3 v22.4,43.6 | 26.1,39.9 arc180 26.5,39.9
  Top 0.4: CON1.1 33.47,33.73 34.1,33.1 34.1,31.7 33.2,30.8 31.7,30.8 31.6,30.7 31.59,30.7 IC1.8
  Top 0.5: IC1.7 29.4,29.43 arc-90 28.9,29.93 | IC1.8 29.4,30.7 | 29.4,30.7 arc90 28.9,30.2 28.9,29.93 | 28.9,29.5 28.9,29.93 | 29.4,30.7 29.39,30.7 arc-90 28.9,31.2 28.7,31.2 C4.1
  Top 0.6: v26.3,39.5 C9.1
  Bottom 0.2: 23.3,39.9 arc-90 23.1,40.1 | 21.1,39.9 arc-90 21.3,39.7 | 17.5,39.7 arc-90 17.7,39.9 | 25.1,38.4 arc-90 25.3,38.2 | 26.7,33.2 arc-90 26.5,33.4
  other vias: 16.3,41 16.3,40.3 16.5,34.6 27.9,32.1 27.9,32.8
  pour Top (no thermals): 17.5,41.3 15.9,41.3 15.9,39.4 17.5,39.4
  pour Top (no thermals): 26.5,39.7 26.1,39.7 26.1,38.7 26.5,38.7
  pour Top (no thermals): 16.9,35.6 15.9,35.6 15.9,33.6 16.9,33.6
  pour Top (no thermals): 27.6,33.2 27.6,31.8 29,31.8 29,33.2
  pour Top (no thermals): 28.4,29.3 29,29.3 29,31.7 28.4,31.7
  pour Bottom: 17.5,41.3 17.5,33.4 15.9,33.4 15.9,41.3
  pour Bottom: 25.3,39.9 26.5,39.9 26.5,31.8 25.3,31.8
  pour Bottom (no thermals): 26.5,33.2 26.5,31.8 28.2,31.8 28.2,33.2
  pour Top (no thermals): 21.3,44.1 21.3,43.4 22.6,43.4 22.6,44.1
  pour Bottom: 21.3,44.1 23.1,44.1 23.1,38.4 21.3,38.4
  pour Bottom: 15.9,41.3 23.1,41.3 23.1,39.9 15.9,39.9
  pour Bottom: 21.3,39.9 26.5,39.9 26.5,38.4 21.3,38.4
VCC1  (via drill 0.3)
  Top 0.2: R2.2 C15.1 | IC4.3 66.27,28.16 66.3,28.2 68.3,28.2 69.4,29.3 70,29.3 | U2.14 67.1,39.9 | 67.1,39.9 67.1,39.7 v67.3,39.5 67.5,39.7 67.5,39.9 | U2.15 67.5,39.9 | U2.5 63.7,43.3 v63.4,43.6 | 67.1,39.9 arc180 67.5,39.9
  Top 0.4: CON2.1 74.47,33.73 75.1,33.1 75.1,31.7 74.2,30.8 72.7,30.8 72.6,30.7 72.59,30.7 IC4.8
  Top 0.5: IC4.7 70.4,29.43 arc-90 69.9,29.93 | IC4.8 70.4,30.7 | 70.4,30.7 arc90 69.9,30.2 69.9,29.93 | 69.9,29.5 69.9,29.93 | 70.4,30.7 70.39,30.7 arc-90 69.9,31.2 69.7,31.2 C14.1
  Top 0.6: v67.3,39.5 C19.1
  Bottom 0.2: 64.3,39.9 arc-90 64.1,40.1 | 62.1,39.9 arc-90 62.3,39.7 | 58.5,39.7 arc-90 58.7,39.9 | 66.1,38.4 arc-90 66.3,38.2 | 67.7,33.2 arc-90 67.5,33.4
  other vias: 57.3,41 57.3,40.3 57.5,34.6 68.9,32.1 68.9,32.8
  pour Top (no thermals): 58.5,41.3 56.9,41.3 56.9,39.4 58.5,39.4
  pour Top (no thermals): 67.5,39.7 67.1,39.7 67.1,38.7 67.5,38.7
  pour Top (no thermals): 57.9,35.6 56.9,35.6 56.9,33.6 57.9,33.6
  pour Top (no thermals): 68.6,33.2 68.6,31.8 70,31.8 70,33.2
  pour Top (no thermals): 69.4,29.3 70,29.3 70,31.7 69.4,31.7
  pour Bottom: 58.5,41.3 58.5,33.4 56.9,33.4 56.9,41.3
  pour Bottom: 66.3,39.9 67.5,39.9 67.5,31.8 66.3,31.8
  pour Bottom (no thermals): 67.5,33.2 67.5,31.8 69.2,31.8 69.2,33.2
  pour Top (no thermals): 62.3,44.1 62.3,43.4 63.6,43.4 63.6,44.1
  pour Bottom: 62.3,44.1 64.1,44.1 64.1,38.4 62.3,38.4
  pour Bottom: 56.9,41.3 64.1,41.3 64.1,39.9 56.9,39.9
  pour Bottom: 62.3,39.9 67.5,39.9 67.5,38.4 62.3,38.4
VDD
  Top 0.2: IC3.3 13.85,37.75 13.8,37.8 13,37.8
  pour Top (no thermals): 12.6,41.7 14.4,41.7 14.4,39.4 12.6,39.4
  pour Top (no thermals): 11.6,39.9 13.1,41.4 13.1,36.5 11.6,35
VDD1
  Top 0.2: IC5.3 54.85,37.75 54.8,37.8 54,37.8
  pour Top (no thermals): 53.6,41.7 55.4,41.7 55.4,39.4 53.6,39.4
  pour Top (no thermals): 52.6,39.9 54.1,41.4 54.1,36.5 52.6,35
VPP
  Top 0.2: X1.3 11.57,46.43 11.6,46.4 19,46.4 19.5,46.9 25.4,46.9 25.7,46.6 U1.38
VPP1
  Top 0.2: X3.3 52.57,46.43 52.6,46.4 60,46.4 60.5,46.9 66.4,46.9 66.7,46.6 U2.38

## Text on the board
Top: v0.5 | v0.5
Bottom: CC-BY-SA Licensed | CC-BY-SA Licensed
tPlace: board thickness t=1.2mm / silks on top/bottom layers | P2.6 | P2.6 | P2.7 | P2.5 | P2.7 | P2.5 | P2.8 | P2.8 | VPP | VPP | SWCLK | SWCLK | SWDIO | SWDIO | 580 | P1.1 | 580 | P1.1 | P1.0 | P1.0 | P2.4 | P2.4 | MOSI | MOSI | P2.3 | P2.3 | !CS! | !CS! | P2.2 | P2.2 | P2.9 | MISO | P2.9 | MISO | P2.0 | SCK | P2.1 | P2.0 | SCK | P2.1 | P0.0 | P0.7 | P0.0 | P0.7 | P0.1 | P0.6 | P0.1 | P0.6 | DA14583-AT2 / DA14580-AT2 | DA14583-AT2 / DA14580-AT2 | P0.2 | P0.5 | P0.2 | P0.5 | P0.3 | P0.4 | P0.3 | P0.4 | DA1458X brakout | DA1458X brakout | @_K4ZUKI_ | @_K4ZUKI_
bPlace: GND | GND | VDD | VDD | !RESET | !RESET
Vscore: V-CUT | V-CUT | V-CUT | V-CUT | V-CUT | V-CUT
_tNames: C7 | C7 | C6 | C6 | C8 | C8 | Q2 | Q2 | U1 | U1 | C10 | C10 | C1 | C2 | C1 | C2 | L1 | L1 | IC3 | IC3 | R1 | C5 | Q1 | C9 | R1 | C5 | Q1 | C9 | C3 | C3 | IC2 | IC2 | C4 | C4 | IC1 | IC1 | X1 | X2 | X1 | X2